# Altium PCB SB13ECU_EVL_V01_14031129.PcbDoc (part 1 of 2)
Units mil, origin at the board's own origin, x right, y up, seen from the top; angles counter-clockwise.
Board outline 4750 x 3350 mil, 2 copper layers (Top Layer, Bottom Layer); 220 components, 147 nets, 766 pads, 407 vias.
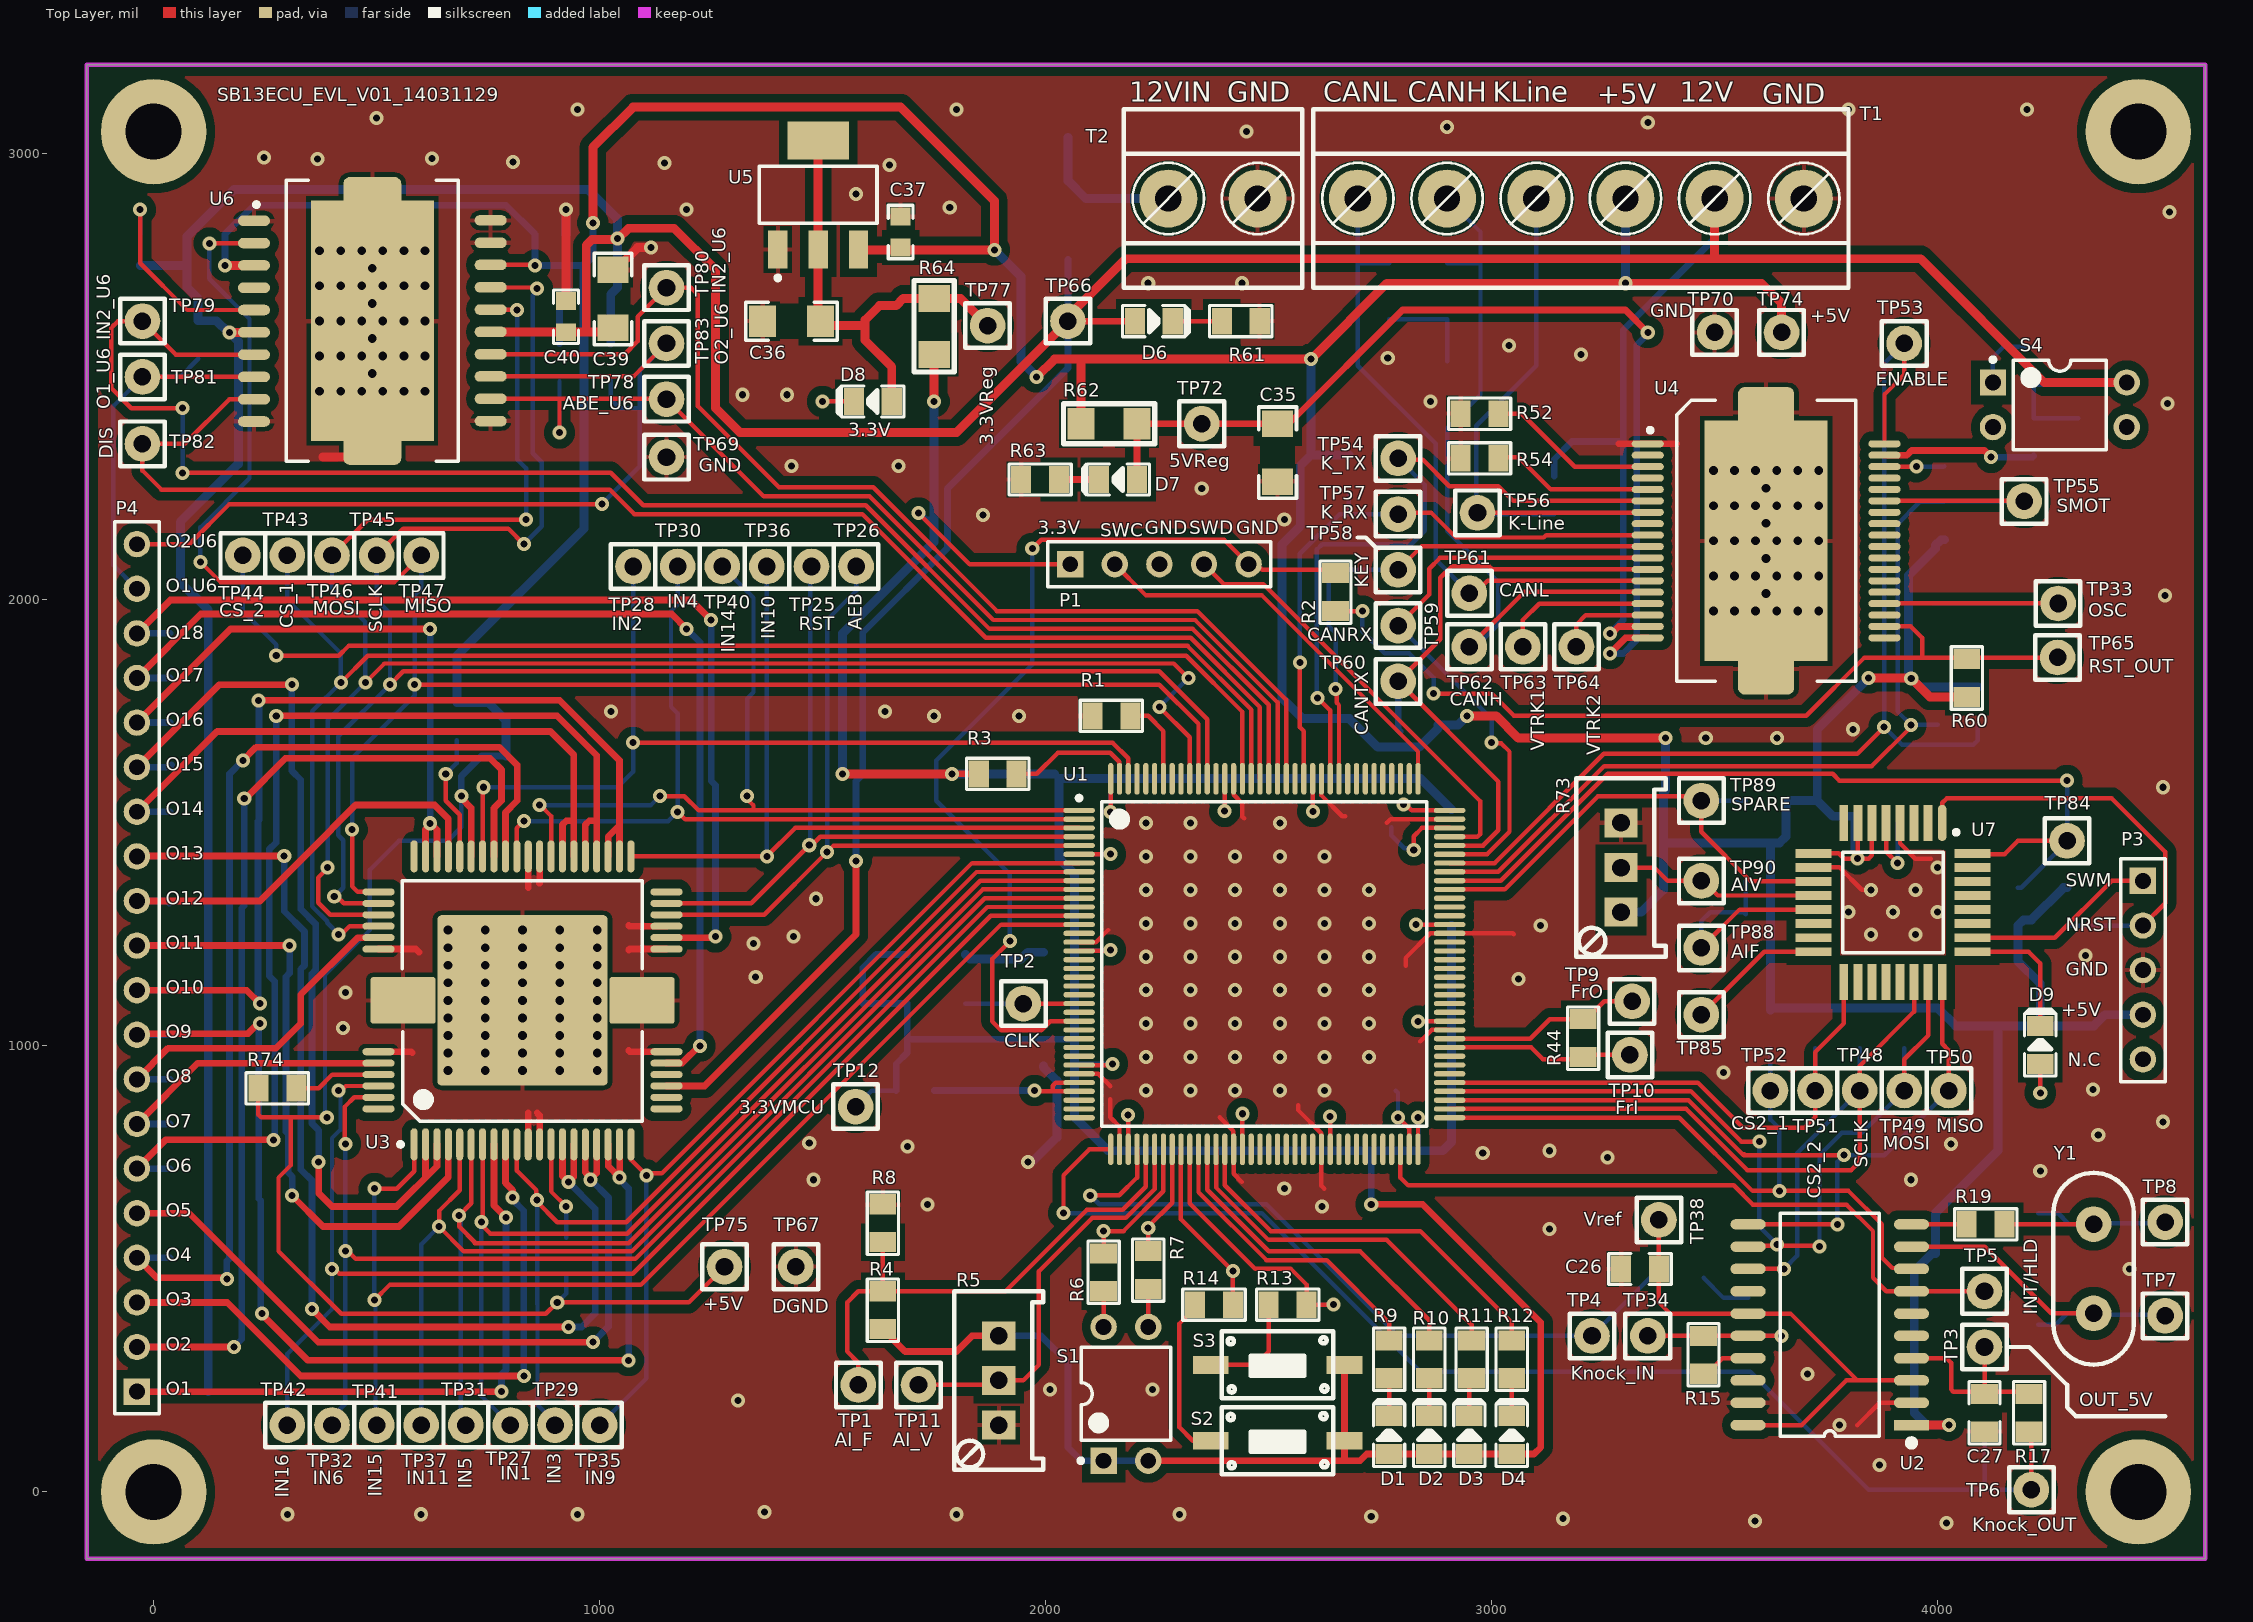
[diagram p0: Top Layer view]
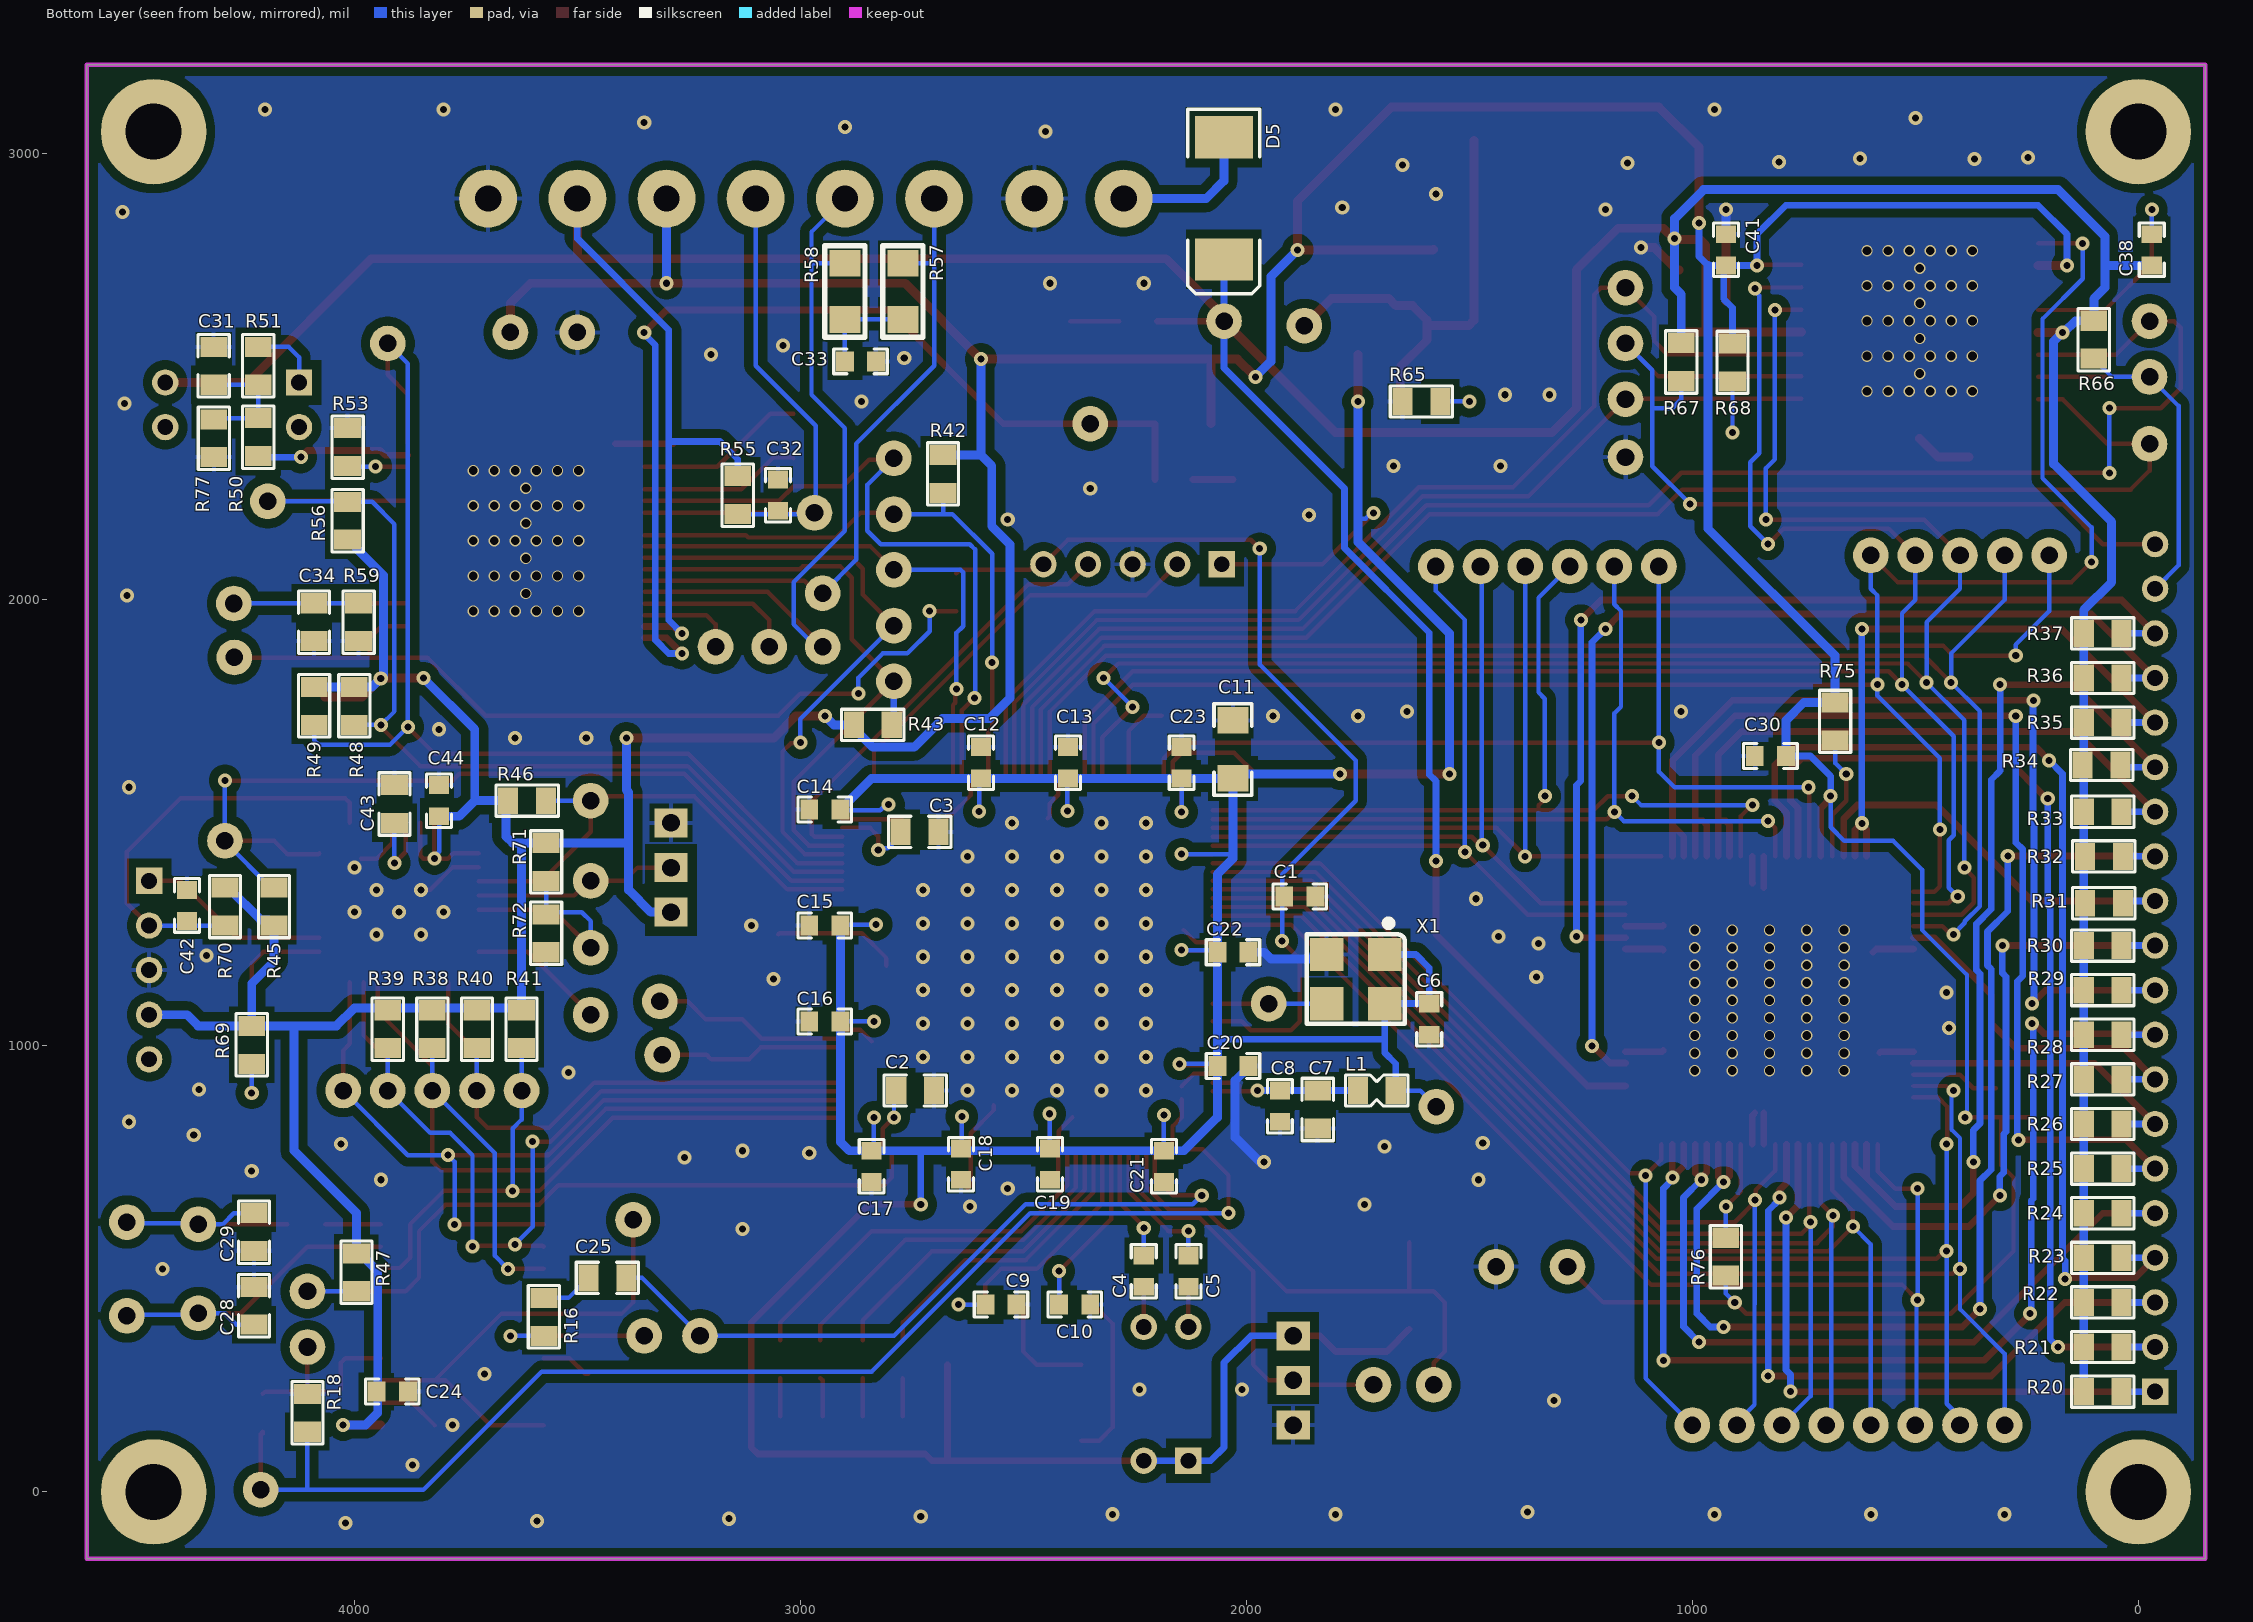
[diagram p1: Bottom Layer view, seen from below]

## Layer stack, top to bottom
Top Solder: solder mask 0.4, Solder Resist, Dk 3.5
Top Layer: signal copper 1.4
Dielectric 1: dielectric 12.6, FR-4, Dk 4.8
Bottom Layer: signal copper 1.4
Bottom Solder: solder mask 0.4, Solder Resist, Dk 3.5

## Board outline
-150,-150 -150,3200 4600,3200 4600,-150

## Design rules (kind name [scope] priority, off if disabled: settings)
Clearance Clearance_Poly [InPoly] p1: gap=20 ignorepadtopadclearanceinfootprint=FALSE
Clearance Clearance_1 [All] p2: gap=7.5 ignorepadtopadclearanceinfootprint=FALSE except(0: Arc-Hole Track-Hole SMDPad-Hole THPad-Hole Via-Hole Fill-Hole Poly-Hole Region-Hole Text-Hole)
HoleSize [All] p1: absolutevalues=TRUE maxlimit=500 minlimit=1 maxpercent=80.000 minpercent=20.000
MinimumSolderMaskSliver [All] p1: minsoldermaskwidth=0
PolygonConnect [IsVia] p1: connectstyle=Direct reliefconductorwidth=10 reliefentries=4 polygonreliefangle="90 Angle" airgapwidth=10
PolygonConnect PolygonConnect_1 [All] p2: connectstyle=Relief reliefconductorwidth=10 reliefentries=4 polygonreliefangle="90 Angle" airgapwidth=10
RoutingVias [All] p1: holewidth=15.75 width=31.5 viastyle="Through Hole" minholewidth=15.75 minwidth=31.5 maxholewidth=28 maxwidth=50
SilkToSilkClearance [All] p1: silktosilkclearance=0
SilkToSolderMaskClearance [IsPad] p1: minsilkscreentomaskgap=0 clearancetoexposedcopper=TRUE
SolderMaskExpansion [All] p1: expansion=4 istentingtop=FALSE
Width [All] p1: maxlimit=50 minlimit=10 preferedwidth=10
26 further rules are at their usual default settings.

## Classes and differential pairs
component class ETC: C38 C39 C40 C41 R66 R67 R68 TP78 TP79 TP80 TP81 TP82 TP83 U6
component class MU: C42 C43 C44 D9 P3 R69 R70 R71 R72 R73 TP84 TP85 TP88 TP89 TP90 U7
component class Knock: C24 C25 C26 C27 C28 C29 R15 R16 R17 R18 R19 TP3 TP4 TP5 TP6 TP7 TP8 TP34 TP38 U2 X2 Y1
component class SBC: C31 C32 C33 C34 R50 R51 R52 R53 R54 R55 R56 R57 R58 R59 R60 R77 S4 TP33 TP53 TP54 TP55 TP56 TP57 TP58 TP59 TP60 TP61 TP62 TP63 TP64 TP65 U4
net class OUt[1..18]: OUt1 OUt2 OUt3 OUt4 OUt5 OUt6 OUt7 OUt8 OUt9 OUt10 OUt11 OUt12 OUt13 OUt14 OUt15 OUt16 OUt17 OUt18
net class DIO[1..28]: DIO1 DIO2 DIO3 DIO4 DIO5 DIO6 DIO7 DIO8 DIO9 DIO10 DIO11 DIO12 DIO13 DIO14 DIO15 DIO16 DIO17 DIO18 DIO19 DIO20 DIO21 DIO22 DIO23 DIO24 DIO25 DIO26 DIO27 DIO28 DIO29 DIO30 DIO31 DIO32
component class Main: P4 R38 R39 R40 R41 R42 R43 R44 R45 R46 R47 R48 R49 T1 TP9 TP10 TP43 TP44 TP45 TP46 TP47 TP48 TP49 TP50 TP51 TP52
component class LSD: C30 R20 R21 R22 R23 R24 R25 R26 R27 R28 R29 R30 R31 R32 R33 R34 R35 R36 R37 R74 R75 R76 TP25 TP26 TP27 TP28 TP29 TP30 TP31 TP32 TP35 TP36 TP37 TP40 TP41 TP42 U3
component class MCU: C1 C2 C3 C4 C5 C6 C7 C8 C9 C10 C11 C12 C13 C14 C15 C16 C17 C18 C19 C20 C21 C22 C23 D1 D2 D3 D4 L1 P1 R1 R2 R3 R4 R5 R6 R7 R8 R9 R10 R11 R12 R13 R14 S1 S2 S3 TP1 TP2 TP11 U1 X1
component class ALL_Power: C35 C36 C37 D5 D6 D7 D8 R61 R62 R63 R64 R65 T2 TP12 TP66 TP67 TP69 TP70 TP72 TP74 TP75 TP77 U5

## Components (designator, comment, footprint, x,y, rotation, side; value= is the part's Value field where it differs from the comment)
C1 "100nF" 0603c 1915,1335 r180 bottom
C2 "2.2uF" 0805C 2785,900 r180 bottom
C3 "2.2uF" 0805C 2775,1480 r180 bottom
C4 "100nF" 0603c 2230,530 r270 bottom
C5 "100nF" 0603c 2130,530 r270 bottom
C6 "100nF" 0603C 1590,1095 r270 bottom
C7 "1uF" 0805C 1840,815 r90 bottom
C8 "100nF" 0603C 1925,830 r90 bottom
C9 "100nF" 0603c 2515,420 r0 bottom
C10 "100nF" 0603c 2350,420 r0 bottom
C11 "10uf/50V" 1206C 2030,1730 r90 bottom value=10uF
C12 "100nF" 0603C 2595,1600 r90 bottom
C13 "100nF" 0603C 2400,1600 r90 bottom
C14 "100nF" 0603C 2910,1530 r0 bottom
C15 "100nF" 0603C 2910,1270 r0 bottom
C16 "100nF" 0603C 2910,1055 r0 bottom
C17 "100nF" 0603C 2840,765 r270 bottom
C18 "100nF" 0603C 2640,770 r270 bottom
C19 "100nF" 0603C 2440,770 r270 bottom
C20 "100nF" 0603C 2065,955 r180 bottom
C21 "100nF" 0603C 2185,765 r270 bottom
C22 "100nF" 0603C 2065,1210 r180 bottom
C23 "100nF" 0603C 2145,1600 r90 bottom
C24 "100nF" 0603c 3950,225 r180 bottom
C25 "1nF" 0805C 3390,480 r0 bottom
C26 "1nF" 0805C 3290,500 r0 top
C27 "1nF" 0805C 4105,135 r90 top
C28 "1nF" 0805C 4225,375 r90 bottom value=27pF
C29 "27pF" 0805C 4225,625 r270 bottom
C30 "100nF" 0603C 790,1650 r0 bottom
C31 "4.7nF" 0805C 4315.35,2567.48 r270 bottom
C32 "100nF" 0603C 3050,2200 r90 bottom
C33 "100nF" 0603C 2900,2535 r180 bottom
C34 "1nF" 0805C 4090.35,1992.48 r270 bottom
C35 "10uF/50V" 1206C 2520,2265 r270 top value=10uF
C36 "10uF/50V" 1206C 1365,2625 r180 top value=10uF
C37 "100nF" 0603C 1675,2790 r90 top
C38 "100nF" 0603C -30,2820 r270 bottom
C39 "10uF/50V" 1206C 1030,2740 r90 top value=10uF
C40 "100nF" 0603C 925,2600 r90 top
C41 "100nF" 0603C 925,2750 r90 bottom
C42 "100nF" 0603C 4375,1280 r90 bottom
C43 "1uF" 0805c 3910,1500 r90 bottom
C44 "100nF" 0603C 3810,1515 r90 bottom
D1 "RED" 0805LED 2770,85 r90 top
D2 "RED" 0805LED 2860,85 r90 top
D3 "RED" 0805LED 2950,85 r90 top
D4 "RED" 0805LED 3045,85 r90 top
D5 "1N4007" SMC 2050.49,2900.43 r270 bottom
D6 "Green" 0805LED 2200,2625 r0 top
D7 "Green" 0805LED 2205,2270 r180 top
D8 "Green" 0805LED 1655,2445 r180 top
D9 "RED" 0805LED 4230,960 r90 top
L1 "100uH" 0805FB 1665,900 r0 bottom value=BEAD(FCM1608KF-601T03)
P1 "Header 5" HDR1X5 2055,2080 r0 top
P3 "Header 5" HDR1X5 4460,1370 r270 top
P4 "Header 20" HDR1X20 -37.5,225 r90 top
R1 "10K" 0805 2105,1740 r0 top
R2 "0R" 0805 2650,1975 r90 top
R3 "10K" 0805 1850,1610 r0 top
R4 "4.7K" 0805 1635,450 r270 top
R5 "RPot" POT-MULTITURN 1895.4,149.55 r90 top value=10K
R6 "1K" 0805 2130,450 r90 top
R7 "1K" 0805 2230,455 r90 top
R8 "4.7K" 0805 1635,645 r270 top
R9 "1K" 0805 2770,340 r270 top
R10 "1K" 0805 2860,340 r270 top
R11 "1K" 0805 2955,340 r270 top
R12 "1K" 0805 3045,340 r270 top
R13 "1K" 0805 2500,420 r0 top
R14 "1K" 0805 2420,420 r180 top
R15 "100K" 0805 3475,265 r90 top
R16 "100K" 0805 3575,350 r90 bottom
R17 "10K" 0805 4205,135 r90 top
R18 "19.1K" 0805 4105,220 r270 bottom
R19 "100K" 0805 4150,600 r180 top
R20 "4.7K" 0805 122.5,225 r180 bottom
R21 "4.7K" 0805 122.5,325 r180 bottom
R22 "4.7K" 0805 122.5,425 r180 bottom
R23 "4.7K" 0805 122.5,525 r180 bottom
R24 "4.7K" 0805 122.5,625 r180 bottom
R25 "4.7K" 0805 122.5,725 r180 bottom
R26 "4.7K" 0805 122.5,825 r180 bottom
R27 "4.7K" 0805 122.5,925 r180 bottom
R28 "4.7K" 0805 122.5,1025 r180 bottom
R29 "4.7K" 0805 122.5,1125 r180 bottom
R30 "4.7K" 0805 122.5,1225 r180 bottom
R31 "4.7K" 0805 120,1320 r180 bottom
R32 "4.7K" 0805 120,1425 r180 bottom
R33 "4.7K" 0805 122.5,1525 r180 bottom
R34 "4.7K" 0805 125,1630 r180 bottom
R35 "4.7K" 0805 122.5,1725 r180 bottom
R36 "4.7K" 0805 122.5,1825 r180 bottom
R37 "4.7K" 0805 122.5,1925 r180 bottom
R38 "4.7K" 0805 3825,995 r90 bottom value=4.7k
R39 "4.7K" 0805 3925,995 r90 bottom value=4.7k
R40 "4.7K" 0805 3725,1080 r270 bottom value=4.7k
R41 "4.7K" 0805 3625,995 r90 bottom value=4.7k
R42 "4.7K" 0805 2680,2240 r90 bottom value=4.7k
R43 "4.7K" 0805 2795,1720 r0 bottom value=4.7k
R44 "4.7K" 0805 3205,1060 r270 top value=4.7k
R45 "4.7K" 0805 4180,1270 r90 bottom value=4.7k
R46 "4.7K" 0805 3655,1550 r180 bottom value=4.7k
R47 "4.7K" 0805 3995,535 r270 bottom value=4.7k
R48 "4.7K" 0805 4000,1805 r270 bottom value=4.7k
R49 "4.7K" 0805 4090,1805 r270 bottom value=4.7k
R50 "20K" 0805 4215.35,2407.48 r270 bottom
R51 "3K" 0805 4215.35,2482.48 r90 bottom
R52 "10K" 0805 3015.35,2417.48 r180 top
R53 "27K" 0805 4015,2385 r270 bottom
R54 "10K" 0805 3015.35,2317.48 r180 top
R55 "100K" 0805 3140.35,2277.48 r270 bottom
R56 "1K" 0805 4015,2220 r270 bottom
R57 "60.4R" 1206 2770,2629 r270 bottom
R58 "60.4R" 1206 2900,2629 r270 bottom
R59 "47K" 0805 3990.35,1992.48 r270 bottom
R60 "10K" 0805 4065.35,1782.48 r90 top
R61 "4.7K" 0805 2480,2625 r180 top
R62 "0R" 1206 2205,2395 r0 top
R63 "1K" 0805 1945,2270 r0 top
R64 "0R" 1206 1750,2676 r90 top
R65 "330R" 0805 1650,2445 r180 bottom
R66 "4.7K" 0805 100,2626 r270 bottom value=4.7k
R67 "4.7K" 0805 1025,2576 r270 bottom value=4.7k
R68 "4.7K" 0805 910,2575 r270 bottom value=4.7k
R69 "1K" 0805 4230,960 r90 bottom
R70 "4.7K" 0805 4290,1355 r270 bottom
R71 "4.7K" 0805 3570,1370 r90 bottom
R72 "4.7K" 0805 3570,1210 r90 bottom
R73 "RPot" POT-MULTITURN 3290.4,1299.55 r90 top value=10K
R74 "4.7K" 0805 320,905 r180 top value=4.7k
R75 "4.7K" 0805 680,1770 r270 bottom value=4.7k
R76 "4.7K" 0805 925,570 r270 bottom value=4.7k
R77 "4.7K" 0805 4315,2320 r90 bottom value=4.7k
S1 "SW DIP-2" DIP-4 2180,220 r90 top
S2 "SW-PB" PUSHBUTTON-SMD 2370,115 r0 top
S3 "SW-PB" PUSHBUTTON-SMD 2370,285 r0 top
S4 "SW DIP-2" DIP-4 4273.87,2437.46 r0 top
T1 "TERM6" TERM6 3700.45,2900.4 r180 top
T2 "TERM2" term2 2275.49,2900.43 r0 top
TP1 "TestPoint" TP 1580,240 r0 top
TP2 "TestPoint" TP 1950,1095 r0 top
TP3 "TestPoint" TP 4105,325 r180 top
TP4 "TestPoint" TP 3225,350 r180 top
TP5 "TestPoint" TP 4105,450 r180 top
TP6 "TestPoint" TP 4210,5 r180 top
TP7 "TestPoint" TP 4510,395 r0 top
TP8 "TestPoint" TP 4510,605 r0 top
TP9 "TestPoint" TP 3315,1100 r90 top
TP10 "TestPoint" TP 3310,980 r180 top
TP11 "TestPoint" TP 1715,240 r90 top
TP12 "TestPoint" TP 1574,864 r90 top
TP25 "TestPoint" TP 1475,2075 r90 top
TP26 "TestPoint" TP 1575,2075 r90 top
TP27 "TestPoint" TP 800,150 r90 top
TP28 "TestPoint" TP 1075,2075 r90 top
TP29 "TestPoint" TP 900,150 r90 top
TP30 "TestPoint" TP 1175,2075 r90 top
TP31 "TestPoint" TP 700,150 r90 top
TP32 "TestPoint" TP 400,150 r90 top
TP33 "TestPoint" TP 4270,1992 r90 top
TP34 "TestPoint" TP 3350,350 r270 top
TP35 "TestPoint" TP 1000,150 r90 top
TP36 "TestPoint" TP 1375,2075 r90 top
TP37 "TestPoint" TP 600,150 r90 top
TP38 "TestPoint" TP 3375,610 r270 top
TP40 "TestPoint" TP 1275,2075 r90 top
TP41 "TestPoint" TP 500,150 r90 top
TP42 "TestPoint" TP 300,150 r90 top
TP43 "TestPoint" TP 300,2100 r90 top
TP44 "TestPoint" TP 200,2100 r90 top
TP45 "TestPoint" TP 500,2100 r90 top
TP46 "TestPoint" TP 400,2100 r90 top
TP47 "TestPoint" TP 600,2100 r90 top
TP48 "TestPoint" TP 3825,900 r90 top
TP49 "TestPoint" TP 3925,900 r90 top
TP50 "TestPoint" TP 4025,900 r90 top
TP51 "TestPoint" TP 3725,900 r90 top
TP52 "TestPoint" TP 3625,900 r90 top
TP53 "TestPoint" TP 3925,2575 r90 top
TP54 "TestPoint" TP 2790.35,2317.48 r90 top
TP55 "TestPoint" TP 4193.98,2221.02 r90 top
TP56 "TestPoint" TP 2968.23,2195.36 r90 top
TP57 "TestPoint" TP 2790.35,2192.48 r90 top
TP58 "TestPoint" TP 2790.35,2067.48 r90 top
TP59 "TestPoint" TP 2790.35,1942.48 r90 top
TP60 "TestPoint" TP 2790.35,1817.48 r90 top
TP61 "TestPoint" TP 2950,2015 r90 top
TP62 "TestPoint" TP 2950,1895 r90 top
TP63 "TestPoint" TP 3070,1895 r90 top
TP64 "TestPoint" TP 3190,1895 r90 top
TP65 "TestPoint" TP 4269,1871 r90 top
TP66 "TestPoint" TP 2050,2625 r90 top
TP67 "TestPoint" TP 1440,505 r90 top
TP69 "TestPoint" TP 1150,2320 r90 top
TP70 "TestPoint" TP 3500,2600 r90 top
TP72 "TestPoint" TP 2350,2395 r90 top
TP74 "TestPoint" TP 3650,2600 r90 top
TP75 "TestPoint" TP 1280,505 r90 top
TP77 "TestPoint" TP 1870,2615 r90 top
TP78 "TestPoint" TP 1150,2450 r90 top
TP79 "TestPoint" TP -25,2625 r90 top
TP80 "TestPoint" TP 1150,2700 r90 top
TP81 "TestPoint" TP -25,2500 r90 top
TP82 "TestPoint" TP -25,2350 r90 top
TP83 "TestPoint" TP 1150,2575 r90 top
TP84 "TestPoint" TP 4290,1460 r0 top
TP85 "TestPoint" TP 3470,1070 r0 top
TP88 "TestPoint" TP 3470,1220 r0 top
TP89 "TestPoint" TP 3470,1550 r0 top
TP90 "TestPoint" TP 3470,1370 r0 top
U1 "STM32F407ZGT6" STM-LQFP144_N 2490.35,1183.58 r0 top
U2 "TPIC8101DW" SOIC-20 3941.14,150 r180 top
U3 "TLE6244x" TLE6244 584.06,779.33 r0 top
U4 "L9741" L9741 3350,2350 r0 top
U5 "LD1117S33CTR" sot223 1490,2907.95 r0 top
U6 "TLE8209-2SA" TLE8209-2SA 225,2850 r90 top
U7 "STM8af6226" LQFP-32 3899.76,1321.53 r270 top
X1 "SG-8018CB 16.000000 MHZ TJHPA" OSC-SMT 1690,1205 r0 bottom value=16.00000MHz
Y1 "XTAL" XTAL 4350,600 r270 top value=8.Mhz

## Footprints (in the part's own frame and the unit in brackets; to place one, negate y for a bottom-side part, rotate by r counter-clockwise, add the part's x,y. Pads: shape width x height; smd on the part's side, far side on the other; paste and mask are expansions set on the pad)
0603c [mil]
  rect 40x45 smd: 1(0,0) 2(70,0)
  silkscreen extent -25,-28 95,28
0603C [mil]
  rect 40x45 smd: 1(0,0) 2(70,0)
  silkscreen extent -25,-28 95,28
0805 [mil]
  rect 45x60 smd: 1(0,0) 2(85,0)
  Top Layer pour cut-out: 22.5,-40 62.5,-40 62.5,40 22.5,40
  silkscreen extent -28,-35 112,35
0805C [mil]
  rect 45x60 smd: 1(0,0) 2(85,0)
  Top Layer pour cut-out: 22.5,-40 62.5,-40 62.5,40 22.5,40
  silkscreen extent -28,-35 112,35
0805c [mil]
  rect 45x60 smd: 1(0,0) 2(85,0)
  Top Layer pour cut-out: 22.5,-40 62.5,-40 62.5,40 22.5,40
  silkscreen extent -28,-35 112,35
0805FB [mil]
  rect 45x60 smd: 1(0,0) 2(85,0)
  Top Layer pour cut-out: 22.5,-40 62.5,-40 62.5,40 22.5,40
  silkscreen extent -28,-35 112,35
0805LED [mil]
  rect 45x60 smd: 1(0,0) 2(85,0)
  Top Layer pour cut-out: 22.5,-40 62.5,-40 62.5,40 22.5,40
  silkscreen extent -28,-35 122,35
1206 [mil]
  rect 60x70 smd: 1(0,0) 2(-126,0)
  Top Layer pour cut-out: -30,40 -95,40 -95,-40 -30,-40
  silkscreen extent -165,-45 40,45
1206C [mil]
  rect 60x70 smd: 1(0,0) 2(-130,0)
  Top Layer pour cut-out: -30,40 -95,40 -95,-40 -30,-40
  silkscreen extent -168,-42 38,43
DIP-4 [mm] "DIP; 4 Leads; Row Spacing 7.62 mm; Pitch 2.54 mm"
  rect 1.5x1.5 hole 0.9: 1(-3.81,1.27)
  round 1.5 hole 0.9: 2(-3.81,-1.27) 3(3.81,-1.27) 4(3.81,1.27)
  silkscreen extent -3.93,-2.55 2.65,2.69, body extent -3.15,-2.5 3.15,2.5, height 5.6
HDR1X5 [mm] "Connector; Header; 5 Position"
  rect 1.5x1.5 hole 0.9: 1(0,0)
  round 1.5 hole 0.9: 2(2.54,0) 3(5.08,0) 4(7.62,0) 5(10.16,0)
  silkscreen extent -1.27,-1.27 11.43,1.27
HDR1X20 [mm] "Connector; Header; 20 Position"
  rect 1.5x1.5 hole 0.9: 1(0,0)
  round 1.5 hole 0.9: 2(2.54,0) 3(5.08,0) 4(7.62,0) 5(10.16,0) 6(12.7,0) 7(15.24,0) 8(17.78,0) 9(20.32,0) 10(22.86,0) 11(25.4,0) 12(27.94,0) 13(30.48,0) 14(33.02,0) 15(35.56,0) 16(38.1,0) 17(40.64,0) 18(43.18,0) 19(45.72,0) 20(48.26,0)
  silkscreen extent -1.27,-1.27 49.53,1.27
L9741 [mm]
  oval 1.83x0.4 smd mask+0.127: 1(0,0) 2(0,-0.65) 3(0,-1.3) 4(0,-1.95) 5(0,-2.6) 6(0,-3.25) 7(0,-3.9) 8(0,-4.55) 9(0,-5.2) 10(0,-5.85) 11(0,-6.5) 12(0,-7.15) 13(0,-7.8) 14(0,-8.45) 15(0,-9.1) 16(0,-9.75) 17(0,-10.4) 18(0,-11.05) 19(13.48,-11.05) 20(13.48,-10.4) 21(13.48,-9.75) 22(13.48,-9.1) 23(13.48,-8.45) 24(13.48,-7.8) 25(13.48,-7.15) 26(13.48,-6.5) 27(13.48,-5.85) 28(13.48,-5.2) 29(13.48,-4.55) 30(13.48,-3.9) 31(13.48,-3.25) 32(13.48,-2.6) 33(13.48,-1.95) 34(13.48,-1.3) 35(13.48,-0.65) 36(13.48,0)
  rrect50% 2.5x0.5 smd: 37(4.74,-10.525) 37(4.74,-8.525) 37(4.74,-6.525) 37(4.74,-4.525) 37(4.74,-2.525) 37(4.74,-0.525) 37(8.74,-10.525) 37(8.74,-8.525) 37(8.74,-6.525) 37(8.74,-4.525) 37(8.74,-2.525) 37(8.74,-0.525)
  rrect25% 3.2x2.9 smd: 37(6.74,-12.825) 37(6.74,1.775)
  rect 7x13.7 smd paste-3.5 mask-3.5: 37(6.74,-5.525)
  silkscreen extent 0.02,-13.52 11.84,2.47, body extent -0.92,-14.28 14.4,3.22, height 3.53
LQFP-32 [mm]
  oval 2.058x0.5 smd: 1(-4.533,2.8)
  rect 2.058x0.5 smd: 2(-4.533,2) 3(-4.533,1.2) 4(-4.533,0.4) 5(-4.533,-0.4) 6(-4.533,-1.2) 7(-4.533,-2) 8(-4.533,-2.8) 17(4.533,-2.8) 18(4.533,-2) 19(4.533,-1.2) 20(4.533,-0.4) 21(4.533,0.4) 22(4.533,1.2) 23(4.533,2) 24(4.533,2.8)
  rect 0.5x2.058 smd: 9(-2.8,-4.533) 10(-2,-4.533) 11(-1.2,-4.533) 12(-0.4,-4.533) 13(0.4,-4.533) 14(1.2,-4.533) 15(2,-4.533) 16(2.8,-4.533) 25(2.8,4.533) 26(2,4.533) 27(1.2,4.533) 28(0.4,4.533) 29(-0.4,4.533) 30(-1.2,4.533) 31(-2,4.533) 32(-2.8,4.533)
  silkscreen extent -4.12,-2.85 2.85,3.73
OSC-SMT [mil]
  rect 75x75 smd: 1(0,0) 2(130,0) 3(130,110) 4(0,110)
  silkscreen extent -46,-78 175,155
POT-MULTITURN [mil]
  rect 65x75 hole 39.37: 1(0.45,0.4) 2(100.45,0.4) 3(200.45,0.4)
  silkscreen extent -100,-100 300,100
PUSHBUTTON-SMD [mil]
  rect 80x40 smd: 1(0,0) 2(300,0)
  silkscreen extent 25,-75 275,75
SMC [mm] "DO-214-AB/SMC; 2 C-Bend Leads; Body 7.9 x 5.9 mm, inc. leads (LxW)"
  rect 2.4x3.3 smd: 1(-3.475,0) 2(3.475,0)
  silkscreen extent -5.07,-2.05 5.43,2.05
SOIC-20 [mm]
  rect 2x0.6 smd: 1(0,0)
  oval 2x0.6 smd: 2(0,-1.27) 3(0,-2.54) 4(0,-3.81) 5(0,-5.08) 6(0,-6.35) 7(0,-7.62) 8(0,-8.89) 9(0,-10.16) 10(0,-11.43) 11(9.3,-11.43) 12(9.3,-10.16) 13(9.3,-8.89) 14(9.3,-7.62) 15(9.3,-6.35) 16(9.3,-5.08) 17(9.3,-3.81) 18(9.3,-2.54) 19(9.3,-1.27) 20(9.3,0)
  silkscreen extent -0.25,-12.06 7.46,1.27
sot223 [mm] "SOT-223/SC-73; 4 Leads; Body 6.7 x 7.3 mm, inc. leads (LxW max)"
  rect 1.1x2.15 smd: 1(-2.3,-3.1) 2(0,-3.1) 3(2.3,-3.1)
  rect 3.5x2.15 smd: 4(0,3.1)
  silkscreen extent -3.35,-4.85 3.35,1.63
STM-LQFP144_N [mm] "Thin QFP, 144-Leads, Body 20x20mm, Pitch 0.5mm, IPC Medium Density"
  oval 1.8x0.3 smd: 1(-10.55,8.75) 2(-10.55,8.25) 3(-10.55,7.75) 4(-10.55,7.25) 5(-10.55,6.75) 6(-10.55,6.25) 7(-10.55,5.75) 8(-10.55,5.25) 9(-10.55,4.75) 10(-10.55,4.25) 11(-10.55,3.75) 12(-10.55,3.25) 13(-10.55,2.75) 14(-10.55,2.25) 15(-10.55,1.75) 16(-10.55,1.25) 17(-10.55,0.75) 18(-10.55,0.25) 19(-10.55,-0.25) 20(-10.55,-0.75) 21(-10.55,-1.25) 22(-10.55,-1.75) 23(-10.55,-2.25) 24(-10.55,-2.75) 25(-10.55,-3.25) 26(-10.55,-3.75) 27(-10.55,-4.25) 28(-10.55,-4.75) 29(-10.55,-5.25) 30(-10.55,-5.75) 31(-10.55,-6.25) 32(-10.55,-6.75) 33(-10.55,-7.25) 34(-10.55,-7.75) 35(-10.55,-8.25) 36(-10.55,-8.75) 73(10.55,-8.75) 74(10.55,-8.25) 75(10.55,-7.75) 76(10.55,-7.25) 77(10.55,-6.75) 78(10.55,-6.25) 79(10.55,-5.75) 80(10.55,-5.25) 81(10.55,-4.75) 82(10.55,-4.25) 83(10.55,-3.75) 84(10.55,-3.25) 85(10.55,-2.75) 86(10.55,-2.25) 87(10.55,-1.75) 88(10.55,-1.25) 89(10.55,-0.75) 90(10.55,-0.25) 91(10.55,0.25) 92(10.55,0.75) 93(10.55,1.25) 94(10.55,1.75) 95(10.55,2.25) 96(10.55,2.75) 97(10.55,3.25) 98(10.55,3.75) 99(10.55,4.25) 100(10.55,4.75) 101(10.55,5.25) 102(10.55,5.75) 103(10.55,6.25) 104(10.55,6.75) 105(10.55,7.25) 106(10.55,7.75) 107(10.55,8.25) 108(10.55,8.75)
  oval 0.3x1.8 smd: 37(-8.75,-10.55) 38(-8.25,-10.55) 39(-7.75,-10.55) 40(-7.25,-10.55) 41(-6.75,-10.55) 42(-6.25,-10.55) 43(-5.75,-10.55) 44(-5.25,-10.55) 45(-4.75,-10.55) 46(-4.25,-10.55) 47(-3.75,-10.55) 48(-3.25,-10.55) 49(-2.75,-10.55) 50(-2.25,-10.55) 51(-1.75,-10.55) 52(-1.25,-10.55) 53(-0.75,-10.55) 54(-0.25,-10.55) 55(0.25,-10.55) 56(0.75,-10.55) 57(1.25,-10.55) 58(1.75,-10.55) 59(2.25,-10.55) 60(2.75,-10.55) 61(3.25,-10.55) 62(3.75,-10.55) 63(4.25,-10.55) 64(4.75,-10.55) 65(5.25,-10.55) 66(5.75,-10.55) 67(6.25,-10.55) 68(6.75,-10.55) 69(7.25,-10.55) 70(7.75,-10.55) 71(8.25,-10.55) 72(8.75,-10.55) 109(8.75,10.55) 110(8.25,10.55) 111(7.75,10.55) 112(7.25,10.55) 113(6.75,10.55) 114(6.25,10.55) 115(5.75,10.55) 116(5.25,10.55) 117(4.75,10.55) 118(4.25,10.55) 119(3.75,10.55) 120(3.25,10.55) 121(2.75,10.55) 122(2.25,10.55) 123(1.75,10.55) 124(1.25,10.55) 125(0.75,10.55) 126(0.25,10.55) 127(-0.25,10.55) 128(-0.75,10.55) 129(-1.25,10.55) 130(-1.75,10.55) 131(-2.25,10.55) 132(-2.75,10.55) 133(-3.25,10.55) 134(-3.75,10.55) 135(-4.25,10.55) 136(-4.75,10.55) 137(-5.25,10.55) 138(-5.75,10.55) 139(-6.25,10.55) 140(-6.75,10.55) 141(-7.25,10.55) 142(-7.75,10.55) 143(-8.25,10.55) 144(-8.75,10.55)
  silkscreen extent -10.67,-9.25 9.25,9.57, body extent -10,-10 10,10, height 1.6
term2 [mil]
  round 130 hole 59.05: 1(-0.49,-0.43)
  round 130 hole 59.06: 2(199.51,-0.43)
  silkscreen extent -100,-200 300,200
TERM6 [mil]
  round 130 hole 59.05: 1(0.45,0.4)
  round 130 hole 59.06: 2(200.45,0.4) 3(400.45,0.4) 4(600.45,0.4) 5(800.45,0.4) 6(1000.45,0.4)
  silkscreen extent -100,-200 1100,200
TLE6244 [mm]
  oval 0.4x1.83 smd mask+0.127: 1(0,0) 2(0.65,0) 3(1.3,0) 4(1.95,0) 5(2.6,0) 6(3.25,0) 7(3.9,0) 8(4.55,0) 9(5.2,0) 10(5.85,0) 11(6.5,0) 12(7.15,0) 13(7.8,0) 14(8.45,0) 15(9.1,0) 16(9.75,0) 17(10.4,0) 18(11.05,0) 19(11.7,0) 20(12.35,0) 33(12.35,16.4) 34(11.7,16.4) 35(11.05,16.4) 36(10.4,16.4) 37(9.75,16.4) 38(9.1,16.4) 39(8.45,16.4) 40(7.8,16.4) 41(7.15,16.4) 42(6.5,16.4) 43(5.85,16.4) 44(5.2,16.4) 45(4.55,16.4) 46(3.9,16.4) 47(3.25,16.4) 48(2.6,16.4) 49(1.95,16.4) 50(1.3,16.4) 51(0.65,16.4) 52(0,16.4)
  oval 1.83x0.4 smd mask+0.127: 21(14.375,2.025) 22(14.375,2.675) 23(14.375,3.325) 24(14.375,3.975) 25(14.375,4.625) 26(14.375,5.275) 27(14.375,11.125) 28(14.375,11.775) 29(14.375,12.425) 30(14.375,13.075) 31(14.375,13.725) 32(14.375,14.375) 53(-2.025,14.375) 54(-2.025,13.725) 55(-2.025,13.075) 56(-2.025,12.425) 57(-2.025,11.775) 58(-2.025,11.125) 59(-2.025,5.275) 60(-2.025,4.625) 61(-2.025,3.975) 62(-2.025,3.325) 63(-2.025,2.675) 64(-2.025,2.025)
  rrect25% 1.3x2.3 smd paste+0 mask+0: 65(-1.225,8.2) 65(0.475,8.2) 65(11.875,8.2) 65(13.575,8.2)
  rrect10% 3.7x2.65 smd paste-3.8 mask+0: 65(-0.625,8.2) 65(12.975,8.2)
  rrect50% 0.6x2.3 smd paste+0 mask+0: 65(2.987,5.3) 65(2.987,8.2) 65(2.987,11.1) 65(5.112,5.3) 65(5.112,8.2) 65(5.112,11.1) 65(7.237,5.3) 65(7.237,8.2) 65(7.237,11.1) 65(9.362,5.3) 65(9.362,8.2) 65(9.362,11.1)
  rrect25% 0.8x9.7 smd paste-0.8 mask+0: 65(2.987,8.2) 65(5.112,8.2) 65(7.237,8.2) 65(9.362,8.2)
  rrect5% 9.7x9.7 smd paste-9.8 mask-9.8: 65(6.175,8.2)
  silkscreen extent -0.9,-0.12 12.99,15.01, body extent -2.94,-0.92 15.29,17.31, height 3.33
TLE8209-2SA [mm]
  oval 0.6x1.83 smd: 1(0,0) 2(-1.27,0) 3(-2.54,0) 4(-3.81,0) 5(-5.08,0) 6(-6.35,0) 7(-7.62,0) 8(-8.89,0) 9(-10.16,0) 10(-11.43,0) 11(-11.405,-13.48) 12(-10.135,-13.48) 13(-8.865,-13.48) 14(-7.595,-13.48) 15(-6.325,-13.48) 16(-5.055,-13.48) 17(-3.785,-13.48) 18(-2.515,-13.48) 19(-1.245,-13.48) 20(0.025,-13.48)
  rrect25% 2.3x3.2 smd: 21(-12.702,-6.74) 21(1.298,-6.74)
  rrect25% 3x3.3 smd paste-3.3: 21(-12.402,-6.74) 21(0.998,-6.74)
  rrect50% 0.5x2.5 smd: 21(-8.702,-8.74) 21(-8.702,-4.74) 21(-6.702,-8.74) 21(-6.702,-4.74) 21(-4.702,-4.74) 21(-4.702,-8.74) 21(-2.702,-8.74) 21(-2.702,-4.74)
  rect 13.7x7 smd paste-3.5 mask-3.5: 21(-5.702,-6.74)
  silkscreen extent -13.69,-11.64 2.31,-0.02, body extent -13.9,-14.39 2.5,0.92, height 3.64
TP [mil]
  round 80 hole 39.37: 1(0,0)
  silkscreen extent -50,-50 50,50
XTAL [mil]
  round 80 hole 39.37: 1(-0.49,-0.43) 2(199.51,-0.43)
  silkscreen extent -115,-90 315,90

## Part data
C1 C2 C3 C4 C5 C6 C7 C8 C9 C10 C11 C12 C13 C14 C15 C16 C17 C18 C19 C20 C21 C22 C23 C24 C25 C26 C27 C28 C29 C30 C31 C32 C33 C34 C35 C36 C37 C38 C40 C41 C42 C43 C44: library part Cap, "LOW ESR", LatestRevisionDate=17-Jul-2002, LatestRevisionNote="Re-released for DXP Platform.", PackageDescription="Radial Cap, Thru-Hole; 2 Leads; 0.3 in Pin Spacing", PackageReference=RAD-0.3, Published=8-Jun-2000, Publisher="Altium Limited"
C39: library part Cap, "Low ESR", LatestRevisionDate=17-Jul-2002, LatestRevisionNote="Re-released for DXP Platform.", PackageDescription="Radial Cap, Thru-Hole; 2 Leads; 0.3 in Pin Spacing", PackageReference=RAD-0.3, Published=8-Jun-2000, Publisher="Altium Limited"
D1 D2 D3 D4 D6 D7 D8 D9: library part LED0, LatestRevisionDate=08-Jul-2005, LatestRevisionNote="Mech Layer 1 removed.", PackageDescription="LED; 2 Leads", PackageReference=LED-0, Published=8-Jun-2000, Publisher="Altium Limited"
D5: library part Diode, "1n4007", Code_JEDEC=DO-214-AB, LatestRevisionDate=17-Jul-2002, LatestRevisionNote="Re-released for DXP Platform.", PackageDescription="DO-214-AB/SMC; 2 C-Bend Leads; Body 7.9 x 5.9 mm, inc. leads (LxW)", PackageReference=SMC, PackageVersion=Sep-1996, Published=8-Jun-2000, Publisher="Altium Limited"
L1: library part Inductor, "Inductor", Code_IEC=1005, Code_JEITA=0402, LatestRevisionDate=29-May-2009, LatestRevisionNote="IPC-7351 Footprint Added.", PackageDescription="Chip Inductor", PackageReference=0402-A, Published=8-Jun-2000, Publisher="Altium Limited"
P1 P3: "Header, 5-Pin", LatestRevisionDate=17-Jul-2002, LatestRevisionNote="Re-released for DXP Platform.", Publisher="Altium Limited"
P4: "Header, 20-Pin", LatestRevisionDate=17-Jul-2002, LatestRevisionNote="Re-released for DXP Platform.", Publisher="Altium Limited"
R1 R2 R3 R4 R6 R7 R8 R9 R10 R11 R12 R13 R14 R15 R16 R17 R18 R19 R20 R21 R22 R23 R24 R25 R26 R27 R28 R29 R30 R31 R32 R33 R34 R35 R36 R37 R38 R39 R40 R41 R42 R43 R44 R45 R46 R47 R48 R49 R50 R51 R52 R53 R54 R55 R56 R57 R58 R59 R60 R61 R62 R63 R64 R65 R66 R67 R68 R69 R70 R71 R72 R74 R75 R76 R77: library part Res1, "Resistor", LatestRevisionDate=17-Jul-2002, LatestRevisionNote="Re-released for DXP Platform.", PackageDescription="Axial Device, Thru-Hole; 2 Leads; 0.3 in Pin Spacing", PackageReference=AXIAL-0.3, Published=8-Jun-2000, Publisher="Altium Limited"
R5 R73: "MultiTurn", LatestRevisionDate=17-Jul-2002, LatestRevisionNote="Re-released for DXP Platform.", PackageDescription="Variable Resistor, Thru-Hole; 3 Leads", PackageReference=VR5, Published=8-Jun-2000, Publisher="Altium Limited", Set Position=0.5, Sim Note="Enter the Resistance value and the set point into parameter fields."
S1 S4: "DIP Switch, 2 Position, SPST", LatestRevisionDate=17-Jul-2002, LatestRevisionNote="Re-released for DXP Platform.", PackageReference=DIP-4, Published=24-Mar-1999, Publisher="Altium Limited"
S2 S3: "Switch", LatestRevisionDate=17-Jul-2002, LatestRevisionNote="Re-released for DXP Platform.", PackageDescription="Switch; 2 Leads", PackageReference=SPST-2, Published=24-Mar-1999, Publisher="Altium Limited"
T1: library part MHDR1X6, "Header, 6-Pin", LatestRevisionDate=17-Jul-2002, LatestRevisionNote="Re-released for DXP Platform.", Publisher="Altium Limited"
T2: library part "Header 2", "Header, 2-Pin", LatestRevisionDate=17-Jul-2002, LatestRevisionNote="Re-released for DXP Platform.", Publisher="Altium Limited"
U1: "ARM Cortex-M4 32-bit MCU+FPU, 210 DMIPS, 1024 kB Flash, 192 kB Internal RAM, 114 I/Os, 144-pin LQFP, -40 to 85 degC, Tray", I/Os (High Current)=114, Manufacturer=STMicroelectronics, Operating Frequency(F) (Processor speed) (MHz)=168, Supplier Part Number 1=497-11766-ND, Supply Voltage(Vcc) max (V)=3.6, Supply Voltage(Vcc) min (V)=1.8, ComponentLink1Description="Manufacturer URL", ComponentLink1URL=http://www.st.com/web/en/home.html, ComponentLink2Description=Datasheet, ComponentLink2URL=http://www.st.com/st-web-ui/static/active/en/resource/technical/document/datasheet/DM00037051.pdf, ComponentLink3Description="Package Specification", ComponentLink3URL=http://www.st.com/st-web-ui/static/active/en/resource/technical/document/datasheet/DM00037051.pdf, Core="ARM Cortex-M4", D/A Converter=2x12-bit, DatasheetVersion="Rev. 4", FLASH Size (Prog) (kB)=1024, Internal RAM Size (kB)=192, Mounting Technology="Surface Mount", PackageDescription="144-Pin Low Profile Quad Flat Package, 20 x 20 mm Body, 0.5 mm Pitch", PackageReference=LQFP144, PackageVersion="Rev. 4, 06/2013", Packing=Tray, PartNumber=STM32F407ZGT6, Supplier 1=Digi-Key, Supplier 2=Newark, Supplier 3=Mouser, Supplier Part Number 2=73T2334, Supplier Part Number 3=511-STM32F407ZGT6
U2: "Knock, SO20", Manufacturer=TI, Package=SO20, Code=301, Features="Dual-Channel Knock Sensor Interface", Part Number=TPIC8101DW, Type="Knock Sensor Interface"
U3: "PG-MQFP-64-10", Manufacturer=Infineon, Part Number=TLE6244X, Code=12, Features="AEC Qualified", Package=PG-MQFP-64-10, Priority=1, Type="18 Channel Smart Lowside Switch"
U5: library part AMS1117
X1: library part Oscillator
Y1: "Crystal Oscillator", LatestRevisionDate=17-Jul-2002, LatestRevisionNote="Re-released for DXP Platform.", PackageDescription="Crystal, Thru-Hole; 2 Leads; Body 3.1 x 8.2 mm (Dia.xH)", PackageReference=R38, Published=8-Jun-2000, Publisher="Altium Limited"

## Free pads (board coordinates)
  round 236.22 hole 125.98: 3(0,0) 3(0,3050) 3(4450,0) 3(4450,3050)

## Via types
v1: diameter 31.5, hole 15.75, Top Layer to Bottom Layer, 294 vias
v2: diameter 25.59, hole 19.68, Top Layer to Bottom Layer, tented both sides, 113 vias

## Nets (pads, with @x,y where several pads share a name; then routed paths per layer and width w, separated by ;. In a path a pad name is that pad's centre, name@x,y a point inside that pad or via, vN(x,y) a via of type N, cw(c..) or ccw(c..) an arc to the next point about the centre after c; other vN are vias at no path point)
5V: C24.1 C30.1 C37.1 C41.1 C44.1 P3.4 R38.2 R39.2 R40.1 R41.2 R42.2 R43.2 R45.1 R46.1 R47.1 R48.1 R49.1 R56.2 R60.1 R62.2 R68.1 R69.2 R70.1 R71.2 R73.1 R74.2 R75.1 R76.2 T1.3 TP74.1 TP75.1 U2.1 U3.47 U5.3 U6.3 U6.18 U7.6 U7.7 U7.9 | length 16815.9
  Top Layer w10: R74.2@235,905 235,845.86 240.86,840 307.93,840 ; v1(388.25,840) 307.93,840 ; U6.18@755.71,2751 854,2751 v1(855,2750) ; TP75.1@1280,505 1200,425 v1(905,425) 879.25,399.25 420.75,399.25 280,540 280,705 307.93,732.93 307.93,840 ; U7.9@3721.3,1431.77 3778.23,1431.77 3790,1420 v1(3820,1420) ; U7.7@3821.02,1500 3821.02,1421.02 v1(3820,1420) ; U7.6@3852.52,1500 3852.52,1427.52 3845,1420 v1(3820,1420)
  Top Layer w15: v1(690,1560) 690,1555.54 712.01,1533.53 U3.47@712.01,1425
  Top Layer w20: v1(160,2750) U6.3@225,2750 ; v1(985,2845) 985,3015 1075,3105 1675,3105 1885,2895 v1(1885,2785) 1581.46,2785 U5.3@1580.55,2785.91 ; v1@1980,2499 v1(1980,2500) 2020,2540 2085,2540 ; R62.2@2079,2395 2079,2534 2085,2540 ; v1(2945,1740) 3010,1740 3060,1690 v1(3390,1690) ; TP74.1@3650,2600 3650,2665 3605,2710 v1(3300,2710) 2765,2710 v1(2595,2540) 2085,2540 ; v1(3845,1825) 3845.37,1824.63 3940.37,1824.63 v1(3940.75,1824.25) 3982.52,1782.48 R60.1@4065.35,1782.48 ; U2.1@3941.14,150 v1(4025,150)
  Bottom Layer w10: v1(388.25,840) 384.25,844 384.25,1159.25 485,1260 485,1395 550,1460 660,1460 690,1490 v1(690,1560) ; v1(905,425) 925,445 R76.2@925,485 ; v1@2944.8,1735 2945,1735 v1(2945,1740) ; C44.1@3810,1515 3810,1435.82 3820,1425.82 v1(3820,1420)
  Bottom Layer w15: v1(160,2750) 160,2820 225,2885 790,2885 855,2820 v1(855,2750) C41.1@925,2750 ; v1(690,1560) 690,1605 735,1650 C30.1@790,1650 ; R68.1@910,2575 910,2655 930,2675 930,2745 C41.1@925,2750 ; v1(985,2845) 985,2770 965,2750 C41.1@925,2750
  Bottom Layer w20: C30.1@790,1650 790,1730 750,1770 R75.1@680,1770 680,1875 965,2160 965,2750 ; v1(1885,2785) 1945,2725 1945,2535 v1(1980,2500) ; v1(2595,2540) 2595,2325 ; R42.2@2680,2325 2595,2325 ; v1(2945,1740) 2925,1720 R43.2@2880,1720 2880,1712.5 2837.5,1670 2745,1670 2681.01,1733.99 2576.01,1733.99 2530,1780 2530,2124.44 2570.75,2165.19 2570.75,2300.75 2595,2325 ; R73.1@3290,1300 3335,1300 3385,1350 3385,1455 ; v1(3300,2710) T1.3@3300,2900 ; v1(3390,1690) 3390,1573.44 3385,1568.44 3385,1455 ; C44.1@3810,1515 3765,1515 3730,1550 ; v1(3845,1825) 3730,1710 3730,1550 ; R56.2@4015,2135 4007.5,2135 3995,2122.5 3995,2115 3935,2055 3935,1830 v1(3940.75,1824.25) 3960,1805 R48.1@4000,1805 R49.1@4090,1805 ; v1(4025,150) 3975,150 3947.5,177.5 3947.5,495 3987.5,535 R47.1@3995,535 3995,625 4135,765 4135,1045 ; R70.1@4290,1355 4282.5,1355 4210,1282.5 4192.5,1282.5 R45.1@4180,1270 4180,1190 4230,1140 R69.2@4230,1045 ; P3.4@4460,1070 4375,1070 4350,1045 R69.2@4230,1045 ; 3385,1455 R71.2@3570,1455 3625,1455 ; 3625,1455 3645,1455 3660,1470 3660,1545 3665,1550 3730,1550 ; 3625,1455 R41.2@3625,1080 3630,1085 3825,1085 4000,1085 4040,1045 4135,1045 ; 4135,1045 R69.2@4230,1045
5V_Reg: C35.2 D7.1 R62.1 TP72.1 U4.18 | length 2268.6
  Top Layer w15: D7.1@2205,2270 R62.1@2205,2395 2335,2395 2455,2395 2545,2395 2800,2650 3300,2650 v1(3350,2600) ; v1(3265,1880) 3299.98,1914.98 U4.18@3350,1914.96
  Bottom Layer w15: v1(3265,1880) 3295,1880 3325,1910 3325,2570.91 3350,2595.91 v1(3350,2600)
12v-MR: C38.2 C39.2 C40.1 D5.2 D6.1 R20.1 R21.1 R22.1 R23.1 R24.1 R25.1 R26.1 R27.1 R28.1 R29.1 R30.1 R31.1 R32.1 R33.1 R34.1 R35.1 R36.1 R37.1 R55.1 R66.1 R67.1 S4.4 T1.2 TP66.1 U3.23 U4.17 U6.6 U6.15 | length 12754.6
  Top Layer w15: U3.23@1150,910.24 1150.14,910.38 1235.38,910.38 1575,1250 v1(1575,1415) ; TP66.1@2050,2625 D6.1@2200,2625 ; v1(3265,1925) 3269.46,1925 3285.02,1940.55 U4.17@3350,1940.55
  Top Layer w20: v1(170,2600) U6.6@225,2600 ; U6.15@755.71,2601 756.21,2600.5 970,2600.5 ; C39.2@1025,2600 1024.5,2600.5 970,2600.5 ; T1.2@3500,2900 3500,2770 3495,2765 ; S4.4@4423.87,2487.46 4239.18,2487.46 3961.64,2765 3495,2765 ; 970,2600.5 970,2795 983.28,2808.28 1040,2808.28 1064.96,2833.25 1166.75,2833.25 1260,2740 1260,2430 1315,2375 1800,2375 TP66.1@2050,2625 2050,2635 2180,2765 3495,2765
  Bottom Layer w15: v1(1575,1415) 1575,1593.73 1590,1608.73 1590,1926.52 1780,2116.52 1780,2250 2050,2520 TP66.1@2050,2625 2050,2763.13 D5.2@2050.49,2763.62 ; R55.1@3140.35,2277.48 3140.35,2315.35 3180,2355 3295,2355 ; v1(3265,1925) 3295,1955 3295,2355 ; T1.2@3500,2900 3500,2810 3295,2605 3295,2355
  Bottom Layer w20: C38.2@-30,2750 75,2750 ; R20.1@122.5,225 R21.1@122.5,325 R22.1@122.5,425 R23.1@122.5,525 R24.1@122.5,625 R25.1@122.5,725 R26.1@122.5,825 R27.1@122.5,925 R28.1@122.5,1025 R29.1@122.5,1125 R30.1@122.5,1225 R33.1@122.5,1525 R35.1@122.5,1725 R36.1@122.5,1825 R37.1@122.5,1925 122.5,1977.5 60,2040 60,2175 190,2305 190,2580 v1(170,2600) 166.89,2600 140.89,2626 R66.1@100,2626 100,2675 75,2700 75,2750 ; R67.1@1025,2576 1025,2685 1040,2700 1040,2855 975,2920 180,2920 75,2815 75,2750 ; T1.2@3495,2895 T1.2@3500,2900
  other v1: 1040,2810
12V_In: D5.1 T2.1 | length 338.6
  Bottom Layer w20: D5.1@2050.49,3037.24 2050.49,2939.51 2090,2900 T2.1@2275,2900
16MHz: TP2.1 U1.23 X1.3 | length 255
  Top Layer w10: TP2.1@1950,1095 U1.23@2075,1095
  Bottom Layer w10: X1.3@1820,1095 TP2.1@1950,1095
+3.3V: C36.2 D8.1 R64.1 TP77.1 U5.2 U5.4 | length 1040.8
  Top Layer w20: U5.4@1490,3030 1490,2626.72 1501.72,2615 1595,2615 ; D8.1@1655,2445 1655,2522.5 1595,2582.5 1595,2615 ; TP77.1@1870,2615 1809,2676 R64.1@1750,2676 1681,2676 1665,2660 1627.5,2660 1595,2627.5 1595,2615
+3.3V_MCU: C6.1 C11.2 C12.1 C13.1 C14.1 C15.1 C16.1 C17.1 C18.1 C19.1 C20.1 C21.1 C22.1 C23.1 D1.1 D2.1 D3.1 D4.1 L1.1 P1.1 R3.1 R4.2 R5.3 R64.2 S1.1 S1.2 S2.2 S3.2 TP12.1 U1.6 U1.17 U1.30 U1.39 U1.52 U1.62 U1.72 U1.84 U1.95 U1.108 U1.121 U1.131 U1.144 X1.1 X1.4 | length 10977.3
  Top Layer w10: v1(1714.67,2194.67) 1829.34,2080 P1.1@2055,2080 ; U1.30@2075,957.2 2147.2,957.2 v1(2150,960) ; U1.17@2075,1213.11 2143.11,1213.11 v1(2145,1215) ; U1.6@2075,1429.65 2144.65,1429.65 v1(2145,1430) ; v1@2145.52,1525 U1.144@2145.52,1598.94 ; v1(2185,845) 2185.12,844.88 U1.39@2185.12,768.23 ; v1(2401.43,1526.43) 2401.6,1526.6 U1.131@2401.6,1598.94 ; v1(2441,848) 2441.07,847.93 2441.07,768.3 U1.52@2441.14,768.23 ; U1.121@2598.81,1598.94 2598.81,1526.19 v1(2599,1526) ; U1.62@2637.99,768.23 v1(2638,842) ; v1(2802.1,1541.02) 2807.91,1541.02 2820.86,1528.07 U1.108@2905.71,1528.07 ; v1(2830,1272) 2830.08,1272.08 2905.63,1272.08 U1.95@2905.71,1272.17 ; U1.72@2834.84,768.23 v1@2834.84,836.72 ; v1@2835,836.72 v1(2835,840) ; v1(2835,1055) 2835.32,1055.32 2905.39,1055.32 U1.84@2905.71,1055.63
  Top Layer w15: R4.2@1635,365 1685,315 1800,315 1835,350 R5.3@1895,350 ; v1(1790,1610) R3.1@1850,1610 ; S1.2@2230,70 2670,70 ; S3.2@2670,285 S2.2@2670,115 2670,70 ; v1(2730,645) 2845,645 3110,380 3110,100 3095,85 D4.1@3045,85 D3.1@2950,85 D2.1@2860,85 D1.1@2770,85 2720,85 2705,70 2670,70
  Top Layer w20: v1(1544.25,1610) v1(1790,1610) ; v1(1750,2445) R64.2@1750,2550
  Bottom Layer w10: TP12.1@1574,864 1610,900 L1.1@1665,900 ; v1(1714.67,2194.67) 1720.49,2194.67 1732.66,2182.5 1750,2182.5 ; 2030,1420 2040,1430 v1(2145,1430) ; C20.1@2065,955 2070,960 v1(2150,960) ; C22.1@2065,1210 2070,1215 v1(2145,1215) ; v1(2145,1525) C23.1@2145,1600 ; C21.1@2185,765 v1(2185,845) ; C13.1@2400,1600 2401.43,1598.57 v1(2401.43,1526.43) ; C19.1@2440,770 2441,771 v1(2441,848) ; C12.1@2595,1600 2599,1596 v1(2599,1526) ; v1(2638,842) 2638,772 C18.1@2640,770 ; v1(2802.1,1541.02) 2807.91,1541.02 2820.61,1528.32 2908.32,1528.32 C14.1@2910,1530 ; v1(2830,1272) 2908,1272 C15.1@2910,1270 ; v1(2835,840) 2835,770 C17.1@2840,765 ; v1(2835,1055) C16.1@2910,1055
  Bottom Layer w15: L1.1@1665,900 1665,960 1690,985 1690,1015 ; X1.1@1690,1205 1620,1205 1590,1175 C6.1@1590,1095 X1.4@1690,1095 1690,1015 ; R5.3@1895,350 1990,350 2050,290 2050,100 2080,70 S1.1@2130,70 S1.2@2230,70 ; C11.2@2020,1610 C11.2@2030,1600 ; 2065,1015 1690,1015 ; 2725,765 2730,760 v1(2730,645)
  Bottom Layer w20: v1(1544.25,1610) 1545,1610.75 1545,1925 1750,2130 1750,2182.5 v1(1750,2445) ; v1(1790,1610) C11.2@2020,1610 ; C15.1@2910,1270 C16.1@2910,1055 2910,785 2890,765 C17.1@2840,765 2725,765 C21.1@2185,765 2140,765 2065,840 C20.1@2065,955 2065,1015 C22.1@2065,1210 2065,1385 2030,1420 C11.2@2030,1600 C23.1@2145,1600 C13.1@2400,1600 C12.1@2595,1600 2840,1600 C14.1@2910,1530